# Altium PCB F407Z.PcbDoc (part 3 of 3)
Units mil, origin at the board's own origin, x right, y up, seen from the top; angles counter-clockwise.
Board outline 4724.41 x 3937.01 mil, 2 copper layers (Top Layer, Bottom Layer), stack 61.855 mil thick; 103 components, 137 nets, 547 pads, 2347 vias.
Unrouted connection lines stored in the file: 2.
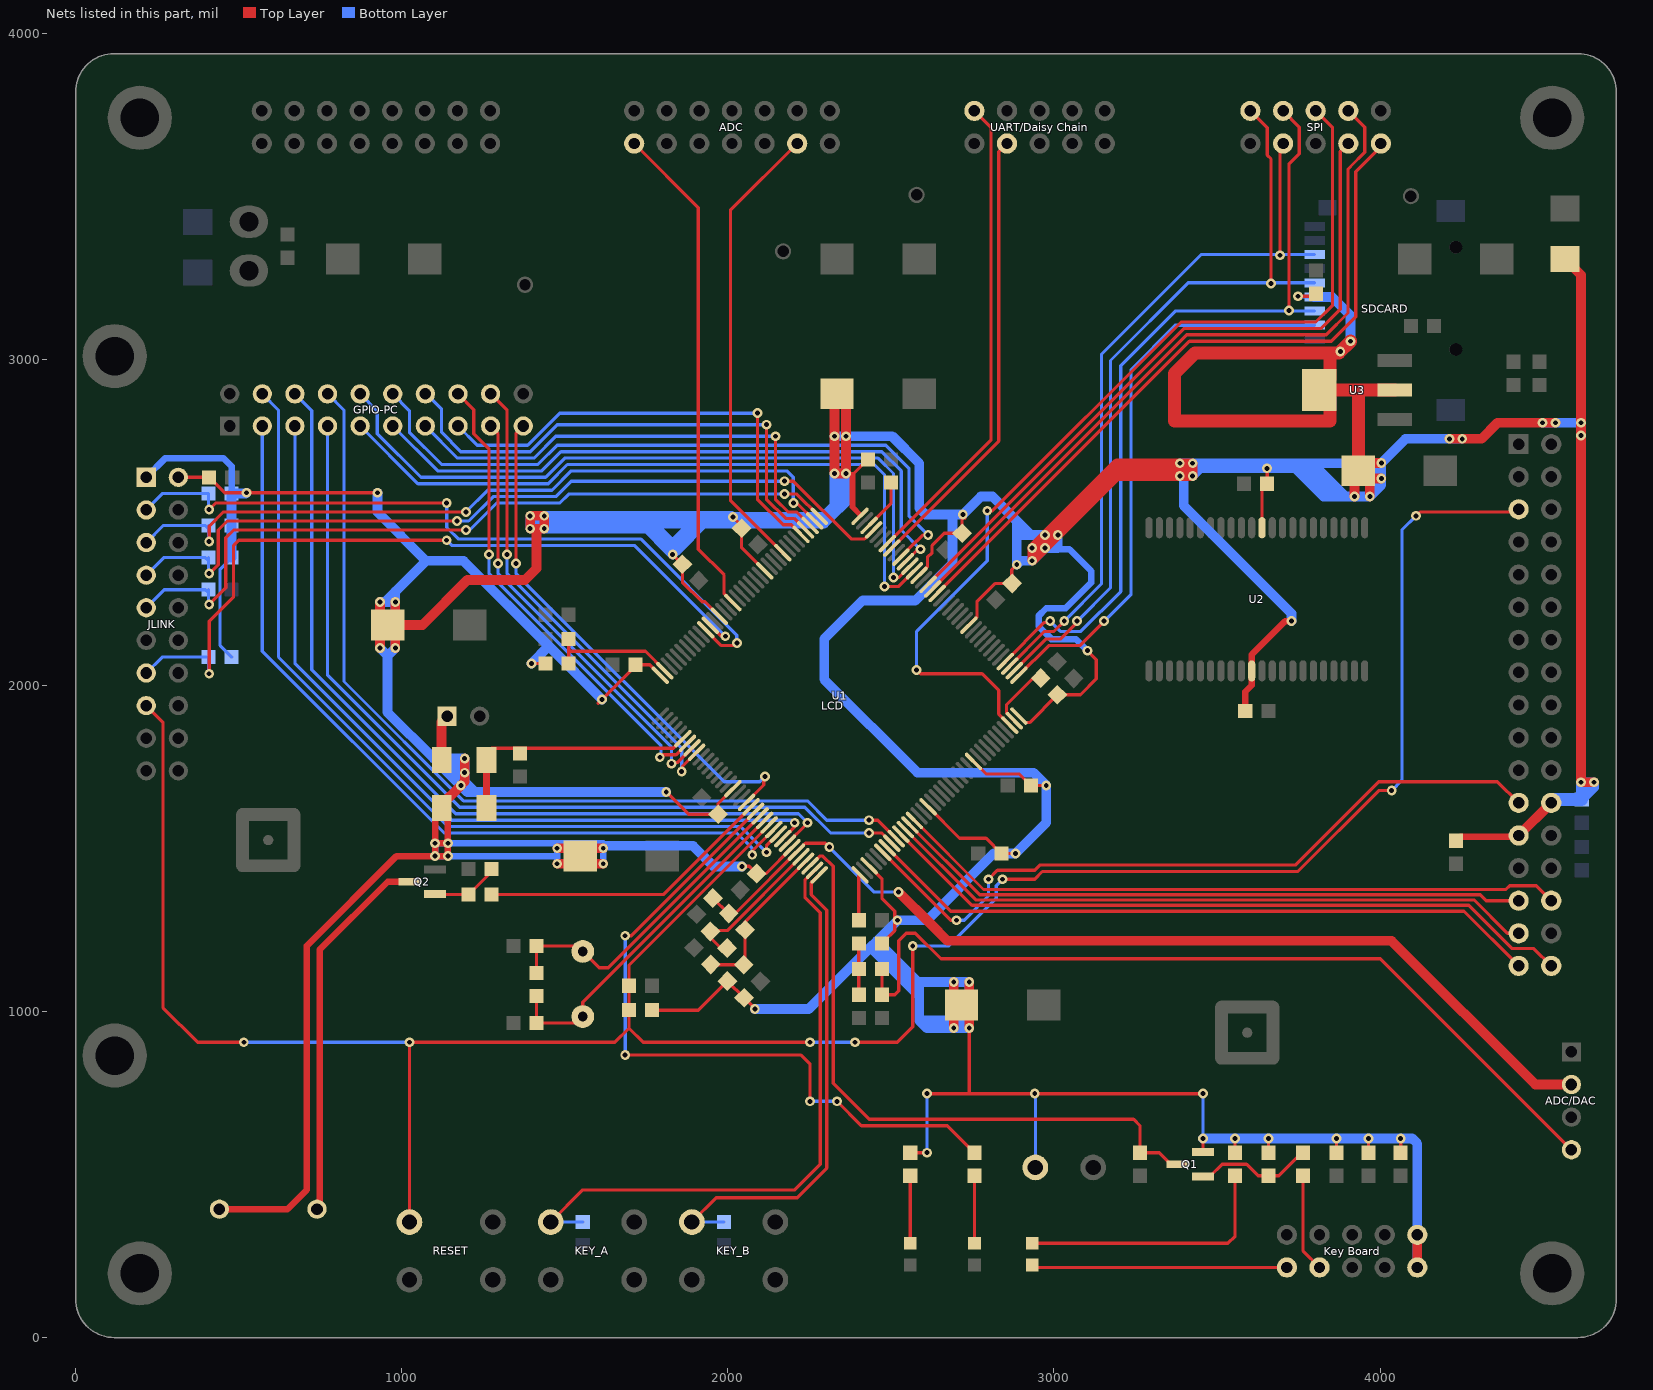
[diagram p3: the nets of this part, all layers, seen from the top]

## Via types
v1: diameter 30, hole 15, Top Layer to Bottom Layer, tented both sides, 2344 vias
v2: diameter 30, hole 15, Top Layer to Bottom Layer, 3 vias

## Nets (pads, with @x,y where several pads share a name; then routed paths per layer and width w, separated by ;. In a path a pad name is that pad's centre, name@x,y a point inside that pad or via, vN(x,y) a via of type N, cw(c..) or ccw(c..) an arc to the next point about the centre after c; other vN are vias at no path point) (continued)
JTCK: JLINK.9 R13.2 U1.109 | length 2393
  Top Layer w10: v1(409.45,2248.03) 460.63,2299.21 460.63,2452.76 484.25,2476.38 v1(1196.85,2476.38) ; v1(2173.23,2586.61) 2211.59,2586.61 U1.109@2279.88,2518.32
  Bottom Layer w10: JLINK.9@216.54,2237.8 272.05,2293.31 397.64,2293.31 R13.2@407.48,2283.46 ; R13.2@407.48,2293.31 R13.2@407.48,2283.46 ; v1(409.45,2248.03) 407.48,2250 R13.2@407.48,2283.46 ; v1(1196.85,2476.38) 1208.66,2476.38 1291.34,2559.06 1484.25,2559.06 1511.81,2586.61 v1(2173.23,2586.61)
JTDI: JLINK.5 R11.2 U1.110 | length 2350.2
  Top Layer w10: v1(409.45,2440.94) 409.45,2488.19 452.76,2531.5 v1(1196.85,2531.5) ; v1(2200.79,2559.06) 2211.31,2559.06 U1.110@2265.96,2504.4
  Bottom Layer w10: JLINK.5@216.54,2437.8 268.9,2490.16 397.64,2490.16 R11.2@407.48,2480.32 ; R11.2@407.48,2490.16 R11.2@407.48,2480.32 ; v1(409.45,2440.94) 407.48,2442.91 R11.2@407.48,2480.32 ; v1(1196.85,2531.5) 1263.78,2598.43 1460.63,2598.43 1519.69,2657.48 2181.1,2657.48 2200.79,2637.8 v1(2200.79,2559.06)
JTDO: JLINK.13 R14.2 U1.133 | length 2384.4
  Top Layer w10: v1(409.45,2035.43) 409.45,2196.85 484.25,2271.65 484.25,2429.13 500,2444.88 v1(1137.8,2444.88) ; U1.133@1945.82,2184.26 1979.48,2150.59 v1(1992.13,2150.59)
  Bottom Layer w10: JLINK.13@216.54,2037.8 265.35,2086.61 R14.2@407.48,2086.61 407.48,2037.4 v1(409.45,2035.43) ; v1(1137.8,2444.88) 1153.54,2429.13 1713.58,2429.13 v1(1992.13,2150.59)
JTMS: JLINK.7 R12.2 U1.105 | length 2569.4
  Top Layer w10: v1(409.45,2342.52) 437.01,2370.08 437.01,2476.38 464.57,2503.94 v1(1169.29,2503.94) ; v1(2173.23,2625.98) 2200.79,2625.98 2377.95,2448.82 2419.17,2448.82 U1.105@2446.92,2476.56
  Bottom Layer w10: JLINK.7@216.54,2337.8 270.47,2391.73 397.64,2391.73 R12.2@407.48,2381.89 ; R12.2@407.48,2391.73 R12.2@407.48,2381.89 ; v1(409.45,2342.52) 407.48,2344.49 R12.2@407.48,2381.89 ; v1(1169.29,2503.94) 1204.72,2503.94 1206.28,2505.5 1207.62,2505.5 1280.86,2578.74 1472.44,2578.74 1519.69,2625.98 v1(2173.23,2625.98)
JTRST: JLINK.3 R10.2 U1.134 | length 2242.6
  Top Layer w10: v1(409.45,2539.37) 429.13,2559.06 v1(1137.8,2559.06) ; U1.134@1931.9,2170.34 1980.18,2122.05 2019.68,2122.05 v1(2027.56,2129.92)
  Bottom Layer w10: JLINK.3@216.54,2537.8 267.32,2588.58 R10.2@407.48,2588.58 407.48,2541.34 v1(409.45,2539.37) ; v1(1137.8,2559.06) 1137.8,2484.25 1141.73,2480.31 1173.23,2448.82 1732.28,2448.82 2027.56,2153.54 v1(2027.56,2129.92)
KB_INT: "Key Board.8" R19.2 | length 303.6
  Top Layer w10: R19.2@3767.72,496.06 3763.78,492.13 3763.78,265.35 3814.17,214.96
LCD_BL: LCD.23 U1.42 | length 2259.6
  Top Layer w10: U1.42@2474.75,1488.28 2675.64,1287.4 2683.51,1279.53 v1(2700.79,1279.53) ; v1(2799.21,1405.51) 2826.52,1432.82 2940.69,1432.82 2956.69,1448.82 3740.16,1448.82 3996.06,1704.72 4359.57,1704.72 LCD.23@4424.69,1639.61
  Bottom Layer w10: v1(2700.79,1279.53) 2724.41,1279.53 2732.28,1287.4 2799.21,1354.33 v1@2799.21,1395.67
NetBT1_1: BT1.1 D1.1 | length 140.9
  Top Layer w30: D1.1@1122.05,1771.65 1122.05,1888.58 BT1.1@1138.98,1905.51
NetC5_1: C5.1 D1.2 D2.2 U1.6 | length 788.4
  Top Layer w10: D1.2@1259.84,1771.65 1259.84,1791.34 1275.59,1807.09 1833.12,1807.09 U1.6@1862.3,1836.27
  Top Layer w20: D2.2@1259.84,1624.02 D1.2@1259.84,1771.65
NetC8_2: C8.2 R21.2 R22.1 | length 157.5
  Top Layer w10: C8.2@2401.57,1051.18 R22.1@2401.57,1129.92 R21.2@2401.57,1208.66
NetIO_1: IO.1 R26.1 | length 206.7
  Top Layer w10: IO.1@2755.91,289.37 R26.1@2755.91,496.06
NetKB_LED_1: KB_LED.1 R17.1 | length 816.1
  Top Layer w10: KB_LED.1@2933.07,289.37 3533.46,289.37 3555.12,311.02 R17.1@3555.12,496.06
NetKB_LED_2: "Key Board.10" KB_LED.2 | length 784.2
  Top Layer w10: KB_LED.2@2933.07,222.44 2940.55,214.96 3714.17,214.96
NetLS1_2: LS1.2 Q2.3 | length 1160.6
  Top Layer w20: LS1.2@740.16,393.7 748.03,401.57 748.03,866.14 748.03,1188.98 956.69,1397.64 Q2.3@1023.62,1397.64
NetON_1: ON.1 R25.1 | length 206.7
  Top Layer w10: ON.1@2559.06,289.37 R25.1@2559.05,496.06
NetQ1_1: Q1.1 R18.1 R19.1 | length 366.6
  Top Layer w10: Q1.1@3456.69,494.09 3478.35,494.09 3515.75,531.5 3590.55,531.5 3625.98,496.06 R18.1@3657.48,496.06 3688.98,496.06 3759.84,566.93 R19.1@3763.78,566.93
NetQ2_1: Q2.1 R23.2 R24.2 | length 211.3
  Top Layer w10: Q2.1@1102.36,1360.24 1104.33,1358.27 R23.2@1204.72,1358.27 1275.59,1429.13 R24.2@1275.59,1437.01
NetR1_1: R1.1 R3.2 U1.32 | length 496.7
  Top Layer w10: R3.2@1946.31,1245.53 R3.2@1952.76,1245.53 ; R1.1@1995.37,1196.47 R1.1@1997.5,1194.35 1978.88,1194.35 1925.2,1248.03 1997.87,1248.03 U1.32@2224.2,1474.36
OSC_IN: C3.1 R2.2 U1.23 Y1.2 | length 995.4
  Top Layer w10: R2.2@1413.39,1118.11 C3.1@1413.39,1185.04 ; C3.1@1413.39,1200.79 C3.1@1413.39,1185.04 ; U1.23@2098.93,1599.64 1633.15,1133.86 1605.51,1133.86 Y1.2@1555.12,1184.25 1538.58,1200.79 1429.13,1200.79 C3.1@1413.39,1185.04
OSC_OUT: C4.1 R2.1 U1.24 Y1.1 | length 1045.4
  Top Layer w10: C4.1@1413.39,964.57 R2.1@1413.39,1047.24 ; C4.1@1433.07,964.57 1535.43,964.57 Y1.1@1555.12,984.25 1555.12,1027.99 U1.24@2112.85,1585.72
PA0: Q1.3 R20.2 U1.34 | length 1967.8
  Top Layer w10: U1.34@2252.04,1446.53 2281.9,1476.38 2291.34,1476.38 2322.83,1444.88 2322.83,779.53 2433.07,669.29 3244.09,669.29 3263.78,649.61 R20.2@3263.78,566.93 3322.83,566.93 3358.27,531.5 Q1.3@3377.95,531.5
PA1: C10.1 KEY_A.1 U1.35 | length 1931.6
  Top Layer w10: KEY_A.1@1456.69,354.33 1555.12,452.76 2204.72,452.76 2283.46,531.5 2283.46,1303.15 2236.22,1350.39 2236.22,1402.86 U1.35@2265.96,1432.61
  Bottom Layer w10: KEY_A.1@1456.69,354.33 C10.1@1555.12,354.33
PA2: C11.1 KEY_B.1 U1.36 | length 1508.8
  Top Layer w10: KEY_B.1@1889.76,354.33 1964.57,429.13 2212.6,429.13 2303.15,519.68 2303.15,1311.02 2255.91,1358.27 2255.91,1394.71 U1.36@2279.88,1418.69
  Bottom Layer w10: KEY_B.1@1889.76,354.33 C11.1@1988.19,354.33
PA3: R21.1 U1.37 | length 140.6
  Top Layer w10: R21.1@2401.57,1279.53 2401.57,1415.1 U1.37@2405.16,1418.69
PA7: LCD.33 U1.43 | length 2086.2
  Top Layer w10: U1.43@2488.67,1502.2 2683.79,1307.09 4257.2,1307.09 LCD.33@4424.69,1139.61
PA9: "UART/Daisy Chain.3" U1.101 | length 1386.9
  Top Layer w10: U1.101@2502.59,2420.89 2830.71,2749 2830.71,3636.22 2855.91,3661.42
PA10: "UART/Daisy Chain.2" U1.102 | length 1479.7
  Top Layer w10: U1.102@2488.67,2434.8 2807.09,2753.22 2807.09,3710.24 2755.91,3761.42
PB0: LCD.34 U1.46 | length 2161.7
  Top Layer w10: U1.46@2530.43,1543.96 2748.38,1326.02 4272.41,1326.02 4405.51,1192.91 4471.38,1192.91 LCD.34@4524.68,1139.61
PB1: LCD.31 U1.47 | length 2012.2
  Top Layer w10: U1.47@2544.35,1557.88 2760.22,1342.02 4287.91,1342.02 4390.32,1239.61 LCD.31@4424.69,1239.61
PB2: LCD.29 U1.48 | length 1962.6
  Top Layer w10: U1.48@2558.27,1571.8 2772.06,1358.02 4307.34,1358.02 4325.75,1339.61 LCD.29@4424.69,1339.61
PB11: SPI.6 U1.70 | length 2913.7
  Top Layer w10: v1(2578.74,2047.24) 2590.55,2035.43 2779.53,2035.43 2830.71,1984.25 2830.71,1911.82 U1.70@2864.5,1878.03 ; v1(2795.28,2535.43) 2811.02,2535.43 3389.76,3114.17 3803.15,3114.17 3854.33,3165.35 3854.33,3709.45 SPI.6@3802.36,3761.42
  Bottom Layer w10: v1(2578.74,2047.24) 2578.74,2165.35 2795.28,2381.89 v1(2795.28,2535.43)
PB12: SDCARD.2 U1.73 | length 1754.7
  Top Layer w10: U1.73@2892.34,2031.14 2983.24,2122.05 3078.74,2122.05 v1(3153.54,2196.85)
  Bottom Layer w10: v1(3153.54,2196.85) 3236.22,2279.53 3236.22,2968.5 3372.05,3104.33 SDCARD.2@3798.9,3104.33
PB13: SDCARD.5 SPI.2 U1.74 | length 2384.4
  Top Layer w10: U1.74@2878.42,2045.06 2975.09,2141.73 3019.69,2141.73 3074.8,2196.84 v1(3070.86,2196.85) ; SPI.2@3602.36,3761.42 3653.54,3710.24 3653.54,3625.98 3665.35,3614.17 v1(3665.35,3232.28)
  Bottom Layer w10: v1(3070.86,2196.85) 3173.23,2299.21 ; 3173.23,2299.23 3173.23,2996.06 3411.42,3234.25 SDCARD.5@3798.9,3234.25
PB14: SDCARD.7 SPI.3 U1.75 | length 2216.3
  Top Layer w10: U1.75@2864.5,2058.98 2970.87,2165.35 3000,2165.35 v1(3031.5,2196.85) ; v1(3692.91,3318.9) 3692.91,3330.71 3692.91,3651.97 SPI.3@3702.36,3661.42
  Bottom Layer w10: v1(3031.5,2196.85) 3145.67,2311.02 3145.67,3015.75 3450.79,3320.87 SDCARD.7@3798.9,3320.87
PB15: SDCARD.3 SPI.4 U1.76 | length 2476.5
  Top Layer w10: U1.76@2850.58,2072.9 2970.59,2192.91 2980.32,2192.91 2988.18,2200.78 v1(2988.18,2196.85) ; SPI.4@3702.36,3761.42 3751.97,3711.81 3751.97,3629.92 3720.47,3598.43 v1(3720.47,3149.61)
  Bottom Layer w10: v1(2988.18,2196.85) 3019.67,2165.35 3082.68,2165.35 3204.72,2287.4 3204.72,2980.31 3372.05,3147.64 SDCARD.3@3798.9,3147.64
PC0: GPIO-PC.3 U1.26 | length 2567.9
  Top Layer w10: v1(2074.8,1480.32) 2074.8,1492 U1.26@2140.69,1557.88
  Bottom Layer w10: GPIO-PC.3@572.44,2795.28 572.44,2104.72 1129.92,1547.24 2027.56,1547.24 2074.8,1500 v1(2074.8,1480.32)
PC1: GPIO-PC.4 U1.27 | length 2646.4
  Top Layer w10: v1@2118.11,1484.25 v1(2118.11,1488.19) 2118.11,1507.46 U1.27@2154.61,1543.96
  Bottom Layer w10: GPIO-PC.4@572.44,2893.7 622.05,2844.09 622.05,2086.61 1141.73,1566.93 2039.37,1566.93 v1(2118.11,1488.19)
PC2: GPIO-PC.5 U1.28 | length 2534.5
  Top Layer w10: U1.28@2168.53,1530.04 2212.6,1574.11 2207.97,1578.74 v1(2204.72,1578.74)
  Bottom Layer w10: GPIO-PC.5@672.44,2795.28 672.44,2067.72 1153.54,1586.61 2196.85,1586.61 v1(2204.72,1578.74)
PC3: GPIO-PC.6 U1.29 | length 2669.9
  Top Layer w10: U1.29@2182.45,1516.12 2244.09,1577.77 v1(2244.09,1578.74)
  Bottom Layer w10: GPIO-PC.6@672.44,2893.7 724.41,2841.73 724.41,2047.24 1165.35,1606.3 2216.54,1606.3 v1(2244.09,1578.74)
PC4: GPIO-PC.7 U1.44 | length 2707.9
  Top Layer w10: v1(2433.07,1547.24) 2471.47,1547.24 U1.44@2502.59,1516.12
  Bottom Layer w10: GPIO-PC.7@772.44,2795.28 772.44,2030.71 1177.17,1625.98 2236.22,1625.98 2314.96,1547.24 v1(2433.07,1547.24)
PC5: GPIO-PC.8 U1.45 | length 2796
  Top Layer w10: v1(2433.07,1586.61) 2459.94,1586.61 U1.45@2516.51,1530.04
  Bottom Layer w10: GPIO-PC.8@772.44,2893.7 822.83,2843.31 822.83,2011.81 1188.98,1645.67 2244.09,1645.67 2303.15,1586.61 v1(2433.07,1586.61)
PC6: GPIO-PC.9 U1.96 | length 2173.1
  Top Layer w10: v1(2480.32,2303.15) 2524.05,2303.15 U1.96@2572.19,2351.29
  Bottom Layer w10: GPIO-PC.9@872.44,2795.28 1049.61,2618.11 1448.82,2618.11 1507.87,2677.17 2448.82,2677.17 2480.32,2645.67 v1(2480.32,2303.15)
PC7: GPIO-PC.10 U1.97 | length 2224.7
  Top Layer w10: v1(2507.87,2330.7) 2505.09,2330.7 2503.94,2331.86 2507.87,2335.8 v1(2507.87,2330.7) 2523.77,2330.71 U1.97@2558.27,2365.21
  Bottom Layer w10: GPIO-PC.10@872.44,2893.7 925.2,2840.94 925.2,2771.65 1059.06,2637.8 1440.94,2637.8 1500,2696.85 2460.63,2696.85 2507.87,2649.61 v1(2507.87,2330.7)
PC8: GPIO-PC.11 U1.98 | length 2001.9
  Top Layer w10: U1.98@2544.35,2379.13 2578.61,2413.39 2590.55,2413.39 v1(2590.55,2417.32) v1@2582.68,2417.32
  Bottom Layer w10: GPIO-PC.11@972.44,2795.28 1110.24,2657.48 1429.13,2657.48 1488.19,2716.54 2472.44,2716.54 2531.5,2657.48 2531.5,2476.38 v1(2590.55,2417.32)
PC9: GPIO-PC.12 U1.99 | length 2106.9
  Top Layer w10: U1.99@2530.43,2393.05 2530.43,2393.97 2579.78,2443.32 2580.71,2443.32 2598.02,2460.63 v1(2614.17,2460.63)
  Bottom Layer w10: GPIO-PC.12@972.44,2893.7 1023.62,2842.52 1023.62,2775.59 1122.05,2677.17 1417.32,2677.17 1476.38,2736.22 2484.25,2736.22 2555.12,2665.35 2555.12,2519.68 v1(2614.17,2460.63)
PC10: GPIO-PC.13 U1.111 | length 1474.3
  Top Layer w10: v1(2145.67,2763.78) 2145.67,2570.87 2185.04,2531.5 2211.03,2531.5 U1.111@2252.04,2490.48
  Bottom Layer w10: GPIO-PC.13@1072.44,2795.28 1170.87,2696.85 1405.51,2696.85 1472.44,2763.78 v1(2145.67,2763.78)
PC11: GPIO-PC.14 U1.112 | length 1582.2
  Top Layer w10: v1(2118.11,2799.21) 2118.11,2570.87 2177.17,2511.81 2202.88,2511.81 U1.112@2238.12,2476.56
  Bottom Layer w10: GPIO-PC.14@1072.44,2893.7 1074.8,2893.7 1122.05,2846.46 1122.05,2775.59 1181.1,2716.54 1393.7,2716.54 1476.38,2799.21 v1(2118.11,2799.21)
PC12: GPIO-PC.15 U1.113 | length 1425.6
  Top Layer w10: v1(2090.55,2834.65) 2090.55,2570.87 2169.29,2492.13 2194.72,2492.13 U1.113@2224.2,2462.64
  Bottom Layer w10: GPIO-PC.15@1172.44,2795.28 1231.5,2736.22 1385.83,2736.22 1484.25,2834.65 v1(2090.55,2834.65)
PC13: GPIO-PC.16 U1.7 | length 1478.7
  Top Layer w10: GPIO-PC.16@1172.44,2893.7 1220.47,2845.67 1220.47,2771.65 1267.72,2724.41 v1(1267.72,2401.57) ; v1(1791.34,1779.53) 1799.21,1787.4 1841.27,1787.4 U1.7@1876.22,1822.35
  Bottom Layer w10: v1(1267.72,2401.57) 1267.72,2342.52 1795.28,1814.96 1795.28,1779.53 v1(1791.34,1779.53)
PC14: GPIO-PC.17 U1.8 | length 1360.9
  Top Layer w10: GPIO-PC.17@1272.44,2795.28 1271.65,2794.49 1295.28,2770.87 v1(1295.28,2374.02) ; v1@1819.87,1751.97 1831.43,1763.53 1846.2,1763.53 1890.14,1807.46 U1.8@1890.14,1808.43 ; v1@1826.77,1758.87 v1(1826.77,1759.84)
  Bottom Layer w10: v1(1295.28,2374.02) 1295.28,2342.52 1826.77,1811.03 v1(1826.77,1759.84)
PC15: GPIO-PC.18 U1.9 | length 1477.4
  Top Layer w10: GPIO-PC.18@1272.44,2893.7 1322.83,2843.31 v1(1322.83,2401.57) ; v1(1858.27,1736.22) 1858.27,1738.82 1860.65,1741.2 1860.65,1751.1 U1.9@1904.06,1794.51
  Bottom Layer w10: v1(1322.83,2401.57) 1322.83,2342.52 1858.27,1807.09 v1(1858.27,1736.22)
PD3: ADC.11 U1.117 | length 1405.8
  Top Layer w10: U1.117@2168.53,2406.97 2007.87,2567.62 2007.87,3456.69 ADC.11@2212.6,3661.42
PDR_ON: R4.2 R5.2 U1.143 | length 394.2
  Top Layer w10: R4.2@1511.81,2066.93 1511.81,2104.33 ; R5.2@1511.81,2141.73 1511.81,2104.33 ; U1.143@1806.62,2045.06 1747.35,2104.33 1511.81,2104.33
PF8: GPIO-PC.19 U1.20 | length 1601.4
  Top Layer w10: v1(1350.39,2374.02) 1350.39,2773.23 1370.08,2792.92 GPIO-PC.19@1372.44,2795.28 ; U1.20@2057.17,1641.4 2110.24,1694.46 2110.24,1720.47 v1(2114.17,1720.47)
  Bottom Layer w10: v1(1350.39,2374.02) 1350.39,2342.52 1370.08,2322.83 1988.19,1704.72 2098.43,1704.72 v1(2114.17,1720.47)
PF9: R23.1 U1.21 | length 907
  Top Layer w10: R23.1@1275.59,1358.27 1801.88,1358.27 U1.21@2071.09,1627.48
PF10: R26.2 U1.22 | length 2185.7
  Top Layer w10: v1(1685.04,866.14) 2224.41,866.14 2251.97,838.58 v1(2251.97,724.41) ; v1(1685.04,1232.28) 1703.74,1232.28 U1.22@2085.01,1613.56 ; v1(2334.65,724.41) 2409.45,649.61 2673.23,649.61 R26.2@2755.91,566.93
  Bottom Layer w10: v1(1685.04,866.14) v1(1685.04,1232.28) ; v1(2251.97,724.41) v1(2334.65,724.41)
PF11: LCD.30 U1.49 | length 2064.2
  Top Layer w10: U1.49@2572.19,1585.72 2783.89,1374.02 4385.83,1374.02 4397.64,1385.83 4478.46,1385.83 LCD.30@4524.69,1339.61
PG6: SPI.9 U1.91 | length 2198.2
  Top Layer w10: U1.91@2641.79,2281.69 3415.21,3055.12 3850.39,3055.12 3925.2,3129.92 3925.2,3574.8 4002.36,3651.97 SPI.9@4002.36,3661.42
PG7: SPI.8 U1.92 | length 2285.9
  Top Layer w10: U1.92@2627.87,2295.61 3407.06,3074.8 3834.65,3074.8 3901.57,3141.73 3901.57,3582.68 3909.2,3590.3 3909.2,3590.88 3952.76,3634.44 3952.76,3711.02 SPI.8@3902.36,3761.42
PG8: SPI.7 U1.93 | length 2131.6
  Top Layer w10: U1.93@2613.95,2309.53 3398.91,3094.49 3818.9,3094.49 3877.95,3153.54 3877.95,3637.01 SPI.7@3902.36,3661.42
PG13: ADC.1 U1.128 | length 1533
  Top Layer w10: ADC.1@1712.6,3661.42 1909.45,3464.57 1909.45,2417.32 1988.19,2338.58 1988.19,2281.08 U1.128@2015.41,2253.85
PWM_OUT: ADC/DAC.4 C9.2 R22.2 | length 2631.5
  Top Layer w10: R22.2@2472.44,1129.92 C9.2@2472.44,1051.18 2511.81,1051.18 2523.62,1062.99 2523.62,1216.54 2547.24,1240.16 2574.8,1240.16 2653.54,1161.42 4000,1161.42 4576.77,584.65 ADC/DAC.4@4576.77,575.98
RESET: C6.1 JLINK.15 LCD.5 R9.1 RESET.1 U1.25 | length 7839.1
  Top Layer w10: JLINK.15@216.54,1937.8 267.72,1886.62 267.72,1011.81 374.02,905.51 v1(515.75,905.51) ; RESET.1@1023.62,354.33 v1(1023.62,905.51) 1653.54,905.51 1696.85,948.82 ; U1.25@2126.77,1571.8 1696.85,1141.88 C6.1@1696.85,1078.74 R9.1@1696.85,1003.94 1696.85,948.82 ; v1(2251.97,905.51) 1740.16,905.51 1696.85,948.82 ; v1(2389.76,905.51) 2519.68,905.51 2566.93,952.76 v1(2566.93,1200.79) ; v1(2842.52,1405.51) 2940.94,1405.51 2964.57,1429.13 3748.03,1429.13 3996.06,1677.17 v1(4035.43,1677.17) ; v1(4110.24,2519.68) 4122.05,2531.5 4416.57,2531.5 LCD.5@4424.69,2539.61
  Bottom Layer w10: v1(515.75,905.51) v1(1023.62,905.51) ; v1(2251.97,905.51) v1(2389.76,905.51) ; v1(2566.93,1200.79) 2677.17,1200.79 2822.83,1346.46 2822.83,1385.83 v1(2842.52,1405.51) ; v1@4027.56,1677.17 v1(4035.43,1677.17) 4066.93,1708.66 4066.93,2476.38 v1(4110.24,2519.68)
VCAP1: C2.2 U1.71 | length 197.5
  Top Layer w10: U1.71@2878.42,1891.95 2854.33,1916.03 2854.33,1940.94 2935.57,2022.19 C2.2@2959.2,2022.19
VCAP2: C1.2 U1.106 | length 163.3
  Top Layer w10: U1.106@2433,2490.48 2500,2557.49 C1.2@2500,2625.98
VCC: 3.3V.1 "Key Board.1" "Key Board.2" C101.2 C102.2 C103.2 C104.2 C105.2 C106.2 C107.2 C108.2 C109.2 C110.2 C111.2 C112.2 C113.2 C114.2 C115.2 C116.2 C117.2 C118.2 C119.2 C120.2 C129.1 C130.1 C131.1 C132.1 C133.1 D2.1 D4.2 JLINK.1 JLINK.2 LCD.24 LCD.25 LS1.1 Q1.2 R4.1 R7.2 R9.2 R10.1 R11.1 R12.1 R14.1 R15.2 R16.2 R17.2 R18.2 R25.2 SDCARD.4 U1.17 U1.30 U1.39 U1.52 U1.62 U1.72 U1.84 U1.95 U1.108 U1.121 U1.131 U1.144 U2.11 U2.33 U3.2 | length 36798.3
  Top Layer w10: JLINK.2@314.96,2637.8 C120.2@409.45,2637.8 456.69,2590.55 v1(523.62,2590.55) 531.5,2598.43 539.37,2590.55 v1(925.2,2590.55) ; D2.1@1122.05,1624.02 D2.1@1122.05,1633.86 ; v1(1397.64,2066.93) R4.1@1440.95,2066.93 ; 1602.36,1944.88 v1(1614.17,1956.69) 1716.54,2059.06 C108.2@1716.54,2062.99 1760.85,2062.99 U1.144@1792.7,2031.14 ; R9.2@1767.72,1003.94 1909.45,1003.94 R7.2@1998.57,1093.06 C116.2@2049.75,1041.87 v1@2083.75,1007.87 ; v1(1811.02,1673.23) 1879.39,1604.87 C109.2@1969.94,1604.87 1969.94,1637.68 U1.17@2015.41,1683.16 ; v1@1826.77,2405.51 C107.2@1860.77,2371.51 1860.77,2316.39 1921.26,2255.91 1929.84,2255.91 U1.131@1973.66,2212.09 ; v1(2015.75,2515.75) 2041.87,2489.62 C106.2@2041.87,2481.75 2041.87,2422.26 U1.121@2112.85,2351.29 ; v1(2043.31,1444.88) 2065.86,1444.88 C110.2@2088.05,1422.69 2116.86,1422.69 U1.30@2196.37,1502.2 ; v1(2082.68,1007.87) v1@2083.75,1007.87 ; v1@2086.61,1005.01 v1@2083.75,1007.87 ; v1(2362.2,2649.61) 2370.08,2649.61 2377.95,2649.61 ; U1.108@2405.16,2518.32 2385.83,2537.65 ; U1.108@2409.45,2523.62 2385.83,2547.24 ; C111.2@2429.13,2692.91 2385.83,2649.61 ; U1.39@2433,1446.53 2472.44,1407.08 2472.44,1347.2 2511.81,1307.83 v1@2511.81,1275.59 ; C101.2@2464.57,1216.54 2480.31,1216.54 2511.81,1248.03 v1@2511.81,1275.59 ; v1(2519.68,1279.53) 2515.75,1279.53 v1@2511.81,1275.59 ; R25.2@2559.05,566.93 2618.11,566.93 v1(2610.24,566.93) ; U1.95@2586.11,2337.37 2611.8,2363.05 2611.8,2392.66 2625.98,2406.85 2625.98,2429.13 2662.85,2466 C112.2@2717.97,2466 2717.97,2521.12 v1@2720.47,2518.61 ; v1(2610.24,748.03) 2740.16,748.03 ; U1.52@2613.95,1627.48 2710.18,1531.24 2791.59,1531.24 C102.2@2838.58,1484.25 v1(2881.89,1484.25) ; v1(2720.47,2523.62) v1@2720.47,2518.61 ; v1@2727.28,2511.81 v1@2720.47,2518.61 ; U1.84@2739.22,2184.26 2763.78,2208.81 2763.78,2255.91 2820.33,2312.46 C105.2@2871.51,2312.46 2879.92,2320.87 2870.08,2311.02 2870.08,2354.33 v1(2885.83,2370.08) ; v1(2740.16,949.37) 2740.16,748.03 ; U1.62@2753.14,1766.67 2791.72,1728.09 2893.95,1728.09 C103.2@2929.13,1692.91 v1(2976.38,1692.91) ; U1.72@2913.39,1885.83 2925.2,1885.83 C104.2@3010.38,1971.01 3081.24,1971.01 3129.92,2019.69 3129.92,2078.74 v1(3102.36,2106.3) ; Q1.2@3456.69,568.9 v1(3456.69,610.24) ; v1(3456.69,748.03) v1(2940.94,748.03) 2740.16,748.03 ; R17.2@3555.12,566.93 v1(3555.12,610.24) ; U2.33@3637.8,2483.27 3637.8,2602.36 C114.2@3653.54,2618.11 v1(3653.54,2665.35) ; R18.2@3657.48,566.93 v1(3657.48,610.24) ; v1(3748.03,3192.91) 3799.21,3192.91 C118.2@3803.15,3196.85 ; R16.2@3866.14,566.93 v1(3866.14,610.24) ; R15.2@3964.57,566.93 v1(3964.57,610.24) ; C115.2@4062.99,566.93 v1(4062.99,610.24) ; 2377.95,2649.61 2385.83,2649.61 ; 2377.95,2649.61 2377.95,2545.53 2385.83,2537.65 ; 2385.83,2537.65 2385.83,2547.24 ; 2385.83,2547.24 2385.83,2649.61
  Top Layer w20: LS1.1@440.94,393.7 649.61,393.7 708.66,452.76 708.66,1200.79 984.25,1476.38 v1(1102.36,1476.38) ; C113.2@3586.61,1921.26 3586.61,1980.32 3606.3,2000 U2.11@3606.3,2044.29 3606.3,2094.49 3708.66,2196.85 v1(3728.35,2196.85) ; C117.2@4248.03,1535.43 4420.51,1535.43 LCD.25@4424.69,1539.61 ; v1(1102.36,1476.38) v1(1102.36,1515.75) ; v1(1102.36,1476.38) v1(1141.73,1476.38) v1(1141.73,1515.75) ; v1(1102.36,1515.75) 1102.36,1604.33 D2.1@1122.05,1624.02 1141.73,1604.33 v1(1141.73,1515.75) ; v1(1102.36,1515.75) v1(1141.73,1515.75)
  Top Layer w30: v1(932.91,2114.72) C129.1@932.91,2161.61 ; C129.1@932.91,2209.02 v1(932.91,2255.91) ; C129.1@956.61,2185.32 1063.27,2185.32 1200.79,2322.83 1377.95,2322.83 1413.39,2358.27 1413.39,2480.32 ; v1(980.32,2114.72) C129.1@980.32,2161.61 ; C129.1@980.32,2209.02 v1(980.32,2255.91) ; D2.1@1122.05,1633.86 v1(1181.1,1692.91) 1192.91,1704.72 v1(1192.91,1732.28) v1(1192.91,1775.59) ; v1(1476.57,1452.95) C130.1@1523.46,1452.95 ; v1(1476.57,1500.35) C130.1@1523.46,1500.35 ; C130.1@1570.87,1452.95 v1(1617.76,1452.95) ; C130.1@1570.87,1500.35 v1(1617.76,1500.35) ; v1(2692.76,949.37) C131.1@2692.76,996.26 ; C131.1@2692.76,1043.66 v1(2692.76,1090.55) ; v1(2740.16,949.37) C131.1@2740.16,996.26 ; C131.1@2740.16,1043.66 v1(2740.16,1090.55) ; v1(3921.26,2578.74) 3921.26,2646.02 C133.1@3932.99,2657.76 3968.5,2622.24 v1(3968.5,2578.74) ; C133.1@3956.77,2634.06 v1(4003.66,2634.06) ; C133.1@3956.77,2681.46 v1(4003.66,2681.46) ; 4114.17,214.96 4114.17,314.96 ; v1(4212.6,2755.91) v1(4251.97,2755.91) 4311.02,2755.91 4360.24,2805.12 v1(4498.03,2805.12) v1(4537.4,2805.12) ; LCD.25@4424.69,1539.61 LCD.24@4524.69,1639.61 ; D4.2@4566.93,3307.09 4616.14,3257.87 v1(4616.14,2805.12) v1(4616.14,2765.75) v1(4616.14,1702.76) v1(4655.51,1702.76) ; 1413.39,2480.32 v1(1393.7,2480.32) v1(1393.7,2519.68) v1(1437.01,2519.68) v1(1437.01,2480.32) 1413.39,2480.32 ; v1(2972.44,2421.26) v1(3011.81,2460.63) ; v1(2972.44,2421.26) v1(2933.07,2381.89) v1(2933.07,2421.26) v1(2972.44,2460.63) ; v1(2972.44,2421.26) v1(2972.44,2460.63) ; v1(2972.44,2460.63) 3011.81,2500 ; v1(3011.81,2460.63) 3011.81,2500 ; v1(3011.81,2460.63) 3192.91,2641.73 v1(3385.83,2641.73) v1(3425.2,2641.73) 3425.2,2665.35 ; 3011.81,2500 3181.1,2669.29 ; 3181.1,2669.29 3421.26,2669.29 3425.2,2665.35 ; 3181.1,2669.29 3192.91,2681.1 v1(3385.83,2681.1) v1(3425.2,2681.1) 3425.2,2665.35 ; v1(2326.77,2649.61) v1(2362.2,2649.61) v1(2362.2,2763.78) 2362.2,2866.34 C132.1@2334.57,2893.98 2326.77,2886.18 v1(2326.77,2763.78) v1(2326.77,2649.61)
  Top Layer w40: v1(3909.45,3055.12) 3874.02,3019.68 3846.46,3019.68 ; C133.1@3933.07,2657.76 3933.07,2905.51 ; U3.2@4045.28,2905.51 U3.2@3838.58,2905.51 ; U3.2@3838.58,2905.51 3846.46,2897.64 3846.46,2811.02 3370.08,2811.02 3370.08,2956.69 3433.07,3019.68 3846.46,3019.68 ; U3.2@3838.58,2905.51 U3.2@3812.99,2905.51 3846.46,2938.98 3846.46,3019.68
  Bottom Layer w10: R14.1@478.35,2086.61 442.91,2122.05 442.91,2356.3 R12.1@478.35,2391.73 ; v1(2610.24,566.93) v1(2610.24,748.03) ; v1(2940.94,748.03) 2942.91,746.06 3.3V.1@2942.91,521.65 ; v1(3456.69,610.24) v1(3456.69,748.03) ; v1(3748.03,3192.91) 3750,3190.95 SDCARD.4@3798.9,3190.95
  Bottom Layer w20: JLINK.1@216.54,2637.8 275.59,2696.85 452.76,2696.85 478.35,2671.26 R10.1@478.35,2588.58 ; 3015.75,2417.32 3047.24,2417.32 3114.17,2350.39 3114.17,2314.96 3035.43,2236.22 2976.38,2236.22 2952.76,2212.6 2952.76,2181.1 2992.13,2141.73 3066.93,2141.73 v1(3102.36,2106.3) ; 1476.38,1515.75 1476.57,1515.55 v1(1476.57,1500.35) 1476.57,1476.65 ; 1476.38,1515.75 v1(1141.73,1515.75) v1(1102.36,1515.75) v1(1102.36,1476.38) v1(1141.73,1476.38) 1476.3,1476.38 1476.57,1476.65 ; 1476.38,1515.75 1618.11,1515.75 1618.11,1507.87 1618.11,1453.31 v1(1617.76,1452.95) v1(1476.57,1452.95) 1476.57,1476.65
  Bottom Layer w30: R12.1@478.35,2391.73 R11.1@478.35,2490.16 R10.1@478.35,2588.58 521.65,2588.58 v1(523.62,2590.55) ; v1(925.2,2590.55) 925.2,2531.5 1074.8,2381.89 ; 952.76,2094.88 v1(932.91,2114.72) v1(932.91,2255.91) 948.82,2255.91 ; v1(1397.64,2066.93) 1450.79,2120.08 ; v1(1614.17,1956.69) 1450.79,2120.08 ; v1@1618.11,1507.87 1893.7,1507.87 1956.69,1444.88 v1(2043.31,1444.88) ; v1(1811.02,1673.23) 1224.41,1673.23 ; v1(2082.68,1007.87) 2248.03,1007.87 2437.01,1196.85 ; v1(2326.77,2649.61) 2326.77,2551.18 ; v1(2326.77,2763.78) v1(2362.2,2763.78) 2503.94,2763.78 2586.61,2681.1 2586.61,2543.31 2606.3,2523.62 2688.98,2523.62 ; 2933.07,2460.63 2929.13,2460.63 ; 3397.64,2625.98 3397.64,2551.18 3728.35,2220.47 v1(3728.35,2196.85) ; 3449.39,2665.92 v1(3425.2,2641.73) ; v1(3456.69,610.24) v1(3555.12,610.24) v1(3657.48,610.24) v1(3866.14,610.24) v1(3964.57,610.24) v1(4062.99,610.24) 4098.43,610.24 4114.17,594.49 4114.17,314.96 4114.17,214.96 ; 3767.72,2637.8 3763.78,2641.73 ; SDCARD.4@3798.9,3190.95 3852.36,3190.95 3909.45,3133.86 v1(3909.45,3055.12) v1(3877.95,3023.62) ; v1(4251.97,2755.91) v1(4212.6,2755.91) 4078.11,2755.91 v1(4003.66,2681.46) ; v1(4498.03,2805.12) v1(4537.4,2805.12) v1(4616.14,2805.12) v1(4616.14,2765.75) ; 948.82,2255.91 v1(980.32,2255.91) ; 948.82,2255.91 980.32,2287.4 ; v1(980.32,2255.91) 980.32,2287.4 ; v1(980.32,2255.91) v1(980.32,2114.72) 960.47,2094.88 956.69,2094.88 956.69,1917.32 1098.43,1775.59 ; 980.32,2287.4 1074.8,2381.89 ; 1074.8,2381.89 1188.98,2381.89 1450.79,2120.08 ; 1098.43,1775.59 1165.35,1775.59 ; 1098.43,1775.59 1129.92,1744.09 ; 1129.92,1744.09 1133.86,1744.09 1165.35,1775.59 ; 1129.92,1744.09 1165.35,1708.66 ; 1165.35,1708.66 v1(1181.1,1692.91) ; 1165.35,1708.66 1165.35,1775.59 ; 1165.35,1775.59 v1(1192.91,1775.59) v1(1192.91,1732.28) 1192.91,1704.72 ; v1(1181.1,1692.91) 1192.91,1704.72 ; v1(1181.1,1692.91) 1200.79,1673.23 1224.41,1673.23 ; 1192.91,1704.72 1224.41,1673.23 ; 1393.7,2496.06 1437.01,2496.06 ; 1393.7,2496.06 v1(1393.7,2480.32) v1(1437.01,2480.32) ; 1393.7,2496.06 v1(1393.7,2519.68) v1(1437.01,2519.68) ; v1(1437.01,2480.32) 1751.97,2480.32 1814.96,2417.32 ; v1(1437.01,2480.32) 1437.01,2496.06 ; 1437.01,2496.06 v1(1437.01,2519.68) ; 1437.01,2496.06 1771.65,2496.06 ; v1(1437.01,2519.68) 2011.81,2519.68 v1(2015.75,2515.75) ; 1771.65,2496.06 1771.65,2492.13 1830.71,2433.07 1846.46,2417.32 ; 1771.65,2496.06 1893.7,2496.06 ; 1814.96,2417.32 v1(1830.71,2401.57) 1846.46,2417.32 ; 1814.96,2417.32 1893.7,2496.06 ; 1846.46,2417.32 1925.2,2496.06 ; 1893.7,2496.06 1925.2,2496.06 ; 1925.2,2496.06 1996.06,2496.06 ; 1996.06,2496.06 v1(2015.75,2515.75) ; 1996.06,2496.06 2295.28,2496.06 2314.96,2515.75 ; v1(2015.75,2515.75) 2291.34,2515.75 ; 2291.34,2515.75 2314.96,2515.75 ; 2291.34,2515.75 2326.77,2551.18 ; 2314.96,2515.75 2362.2,2562.99 v1(2362.2,2649.61) 2334.65,2649.61 2334.65,2559.06 2326.77,2551.18 ; 2437.01,1196.85 2456.69,1216.54 ; 2437.01,1196.85 2586.61,1047.24 ; 2456.69,1216.54 v1(2519.68,1279.53) 2610.24,1279.53 2814.96,1484.25 v1(2881.89,1484.25) 2976.38,1578.74 v1(2976.38,1692.91) 2937.01,1732.28 2581.34,1732.28 2295.28,2018.35 2295.28,2141.73 2413.39,2259.84 2574.8,2259.84 2688.98,2374.02 2688.98,2523.62 ; 2456.69,1216.54 2582.68,1090.55 ; 2582.68,1090.55 2586.61,1086.61 2586.61,1047.24 ; 2582.68,1090.55 v1(2692.76,1090.55) v1(2740.16,1090.55) 2740.16,976.38 ; 2586.61,972.44 2736.22,972.44 2740.16,976.38 ; 2586.61,972.44 2609.69,949.37 v1(2692.76,949.37) v1(2740.16,949.37) 2740.16,976.38 ; 2586.61,972.44 2586.61,1047.24 ; 2688.98,2523.62 v1(2720.47,2523.62) 2775.59,2578.74 2811.02,2578.74 2885.83,2503.94 ; 2885.83,2460.63 2929.13,2460.63 ; 2885.83,2460.63 2885.83,2503.94 ; 2885.83,2460.63 v1(2885.83,2370.08) 2897.64,2381.89 v1(2933.07,2381.89) v1(2972.44,2421.26) ; 2885.83,2503.94 2929.13,2460.63 ; 2929.13,2460.63 v1(2972.44,2460.63) v1(3011.81,2460.63) ; v1(2972.44,2421.26) v1(3011.81,2460.63) ; v1(2972.44,2421.26) 3011.81,2421.26 v1(3011.81,2460.63) ; v1(3425.2,2641.73) 3425.2,2661.42 ; v1(3425.2,2641.73) v1(3385.83,2641.73) v1(3385.83,2681.1) v1(3425.2,2681.1) ; 3425.2,2661.42 3429.7,2665.92 3550.34,2665.92 3550.91,2665.35 ; 3425.2,2661.42 v1(3425.2,2681.1) ; v1(3425.2,2681.1) 3637.8,2681.1 ; 3550.91,2665.35 3740.16,2665.35 ; 3550.91,2665.35 v1(3653.54,2665.35) ; 3637.8,2681.1 v1(3653.54,2665.35) ; 3637.8,2681.1 3759.84,2681.1 ; v1(3653.54,2665.35) 3740.16,2665.35 ; 3740.16,2665.35 3763.78,2641.73 ; 3759.84,2681.1 3759.84,2677.17 3858.27,2578.74 ; 3759.84,2681.1 3795.28,2681.1 ; 3763.78,2641.73 3826.77,2578.74 3858.27,2578.74 ; 3795.28,2681.1 3795.28,2677.17 3893.7,2578.74 ; 3795.28,2681.1 3984.25,2681.1 ; 3858.27,2578.74 3893.7,2578.74 ; 3893.7,2578.74 v1(3921.26,2578.74) v1(3968.5,2578.74) 3984.25,2594.49 ; 3984.25,2594.49 4003.66,2613.9 v1(4003.66,2634.06) v1(4003.66,2681.46) ; 3984.25,2594.49 3984.25,2681.1 ; 3984.25,2681.1 4003.31,2681.1 v1(4003.66,2681.46) ; C119.2@4635.83,1667.32 C119.2@4618.11,1649.61 4616.14,1651.57 v1(4616.14,1702.76) 4635.83,1702.76 ; C119.2@4635.83,1667.32 4635.83,1702.76 ; C119.2@4635.83,1667.32 4655.51,1687.01 v1(4655.51,1702.76) 4635.83,1702.76
  Bottom Layer w40: LCD.24@4524.69,1639.61 4534.69,1649.61 C119.2@4618.11,1649.61
VCCA: C7.2 R1.2 R7.1 U1.33 | length 475.1
  Top Layer w10: R1.2@1947.39,1144.24 1948.46,1143.16 R7.1@2048.68,1143.16 2052.61,1147.1 C7.2@2052.61,1250.54 ; C7.2@2051.18,1273.5 U1.33@2238.12,1460.45
VSSA: ADC/DAC.2 C7.1 R8.1 U1.31 | length 3017.9
  Top Layer w10: R8.1@1954.19,1347.89 2001.43,1300.65 C7.1@2002.5,1300.65 ; C7.1@2022.42,1300.42 2237.75,1515.75 2299.21,1515.75 v1(2311.02,1503.94)
  Top Layer w30: v1(2523.62,1366.14) 2622.05,1267.72 2673.23,1216.54 4035.43,1216.54 4475.98,775.98 ADC/DAC.2@4576.77,775.98
  Bottom Layer w10: v1(2311.02,1503.94) 2448.82,1366.14 v1(2523.62,1366.14)
pads on no net: EUT1.1 EUT2.1 JLINK.11 JLINK.17 JLINK.19 KEY_A.0 KEY_A.3 KEY_B.0 KEY_B.3 LCD.0 LCD.32 RESET.0 RESET.3 SDCARD.0 SDCARD.1 SDCARD.8

## Polygon pours and split planes (outlines as drawn)
GND on Bottom Layer "Bottom Layer-No Net" (solid, remove dead copper, pour order 4): 0,0 4724.41,0 4724.41,3937.01 0,3937.01
GND on Top Layer "Bottom Layer-No Net" (solid, remove dead copper, pour order 2): 0,0 4724.41,0 4724.41,3937.01 0,3937.01

## Keep-outs
Keep-Out Layer:
  lines w10: 98.43,0 177.17,0 ; 196.85,0 4606.3,0 ; 0,118.11 ccw(c118.11,118.11) 118.11,0 ; 0,118.11 ccw(c118.11,118.11) 118.11,0 ; 0,118.11 ccw(c118.11,118.11) 118.11,0 ; 0,118.11 0,3818.9 ; 0,118.11 0,3818.9 ; 0,118.11 0,3818.9 ; 0,3818.9 cw(c118.11,3818.9) 118.11,3937.01 ; 0,3818.9 cw(c118.11,3818.9) 118.11,3937.01 ; 0,3818.9 cw(c118.11,3818.9) 118.11,3937.01 ; 118.11,0 4606.3,0 ; 118.11,0 4606.3,0 ; 118.11,3937.01 4606.3,3937.01 ; 118.11,3937.01 4606.3,3937.01 ; 118.11,3937.01 4606.3,3937.01 ; 4606.3,0 ccw(c4606.3,118.11) 4724.41,118.11 ; 4606.3,0 ccw(c4606.3,118.11) 4724.41,118.11 ; 4606.3,0 ccw(c4606.3,118.11) 4724.41,118.11 ; 4606.3,3937.01 cw(c4606.3,3818.9) 4724.41,3818.9 ; 4606.3,3937.01 cw(c4606.3,3818.9) 4724.41,3818.9 ; 4606.3,3937.01 cw(c4606.3,3818.9) 4724.41,3818.9 ; 4724.41,118.11 4724.41,3818.9 ; 4724.41,118.11 4724.41,3818.9 ; 4724.41,118.11 4724.41,3818.9 ; 433.07,3090.55 ccw(c472.44,3090.55) 472.44,3051.18 1377.95,3051.18 ccw(c1377.95,3090.55) 1417.32,3090.55 1417.32,3129.92 ccw(c1377.95,3129.92) 1377.95,3169.29 472.44,3169.29 ccw(c472.44,3129.92) 433.07,3129.92 433.07,3090.55

## Other copper
Top Layer:
  rectangle net GND: 3513.78,1011.81 3738.19,1055.12
  rectangle net GND: 3671.26,807.09 3730.32,1011.81
  rectangle net GND: 3454.72,811.02 3671.26,854.33
  rectangle net GND: 3450.79,811.02 3513.78,1074.8
  rectangle net GND: 448.82,1401.57 511.81,1665.35
  rectangle net GND: 452.76,1401.57 669.29,1444.88
  rectangle net GND: 669.29,1397.64 728.35,1602.36
  rectangle net GND: 511.81,1602.36 736.22,1645.67
  rectangle net VCC: 3397.64,2811.02 3846.46,3003.94
  rectangle net VCC: 3374.02,2811.02 3413.39,2968.5
  rectangle net VCC: 1393.7,2472.44 1444.88,2519.68
  rectangle net VCC: 2326.77,2649.61 2362.2,2866.34
  rectangle net VCC: 2370.08,2653.54 2393.7,2661.42
  pour cut-out: 3529.53,1000 3655.51,1000 3655.51,870.08 3529.53,870.08
  pour cut-out: 527.56,1590.55 653.54,1590.55 653.54,1460.63 527.56,1460.63
Bottom Layer:
  rectangle net VCC: 2586.61,976.38 2740.16,1086.61
  rectangle net VCC: 2885.83,2374.02 2937.01,2397.64
  rectangle net VCC: 2885.83,2393.7 2956.69,2429.13
  rectangle net VCC: 2877.95,2421.26 2976.38,2460.63
  rectangle net VCC: 932.91,2106.3 976.38,2255.91
  rectangle net VCC: 1102.36,1476.38 1618.11,1515.75
  rectangle net VCC: 1476.57,1452.95 1617.76,1500.35
  rectangle net VCC: 1791.34,2440.94 1874.02,2496.06
  rectangle net VCC: 3385.83,2641.73 3425.2,2681.1
  rectangle net VCC: 3826.77,2578.74 3976.38,2677.17

## Silkscreen, mask and mechanical layers (free items; w line width, h text height)
Top Overlay:
  text "KB" at 2903.54,118.11 h40
Top Solder:
  rectangle: 3409.45,2992.13 3866.14,3019.68
  rectangle: 3385.83,2791.34 3736.22,2992.13
  rectangle: 3732.28,2799.21 3858.27,2814.96
  lines w8.66: 3370.08,2795.28 3846.46,2795.28 ccw(c3846.46,2811.02) 3862.2,2811.02 3862.2,2814.96 3732.28,2814.96
  lines w40: 3716.54,2811.02 3425.2,2811.02 3370.08,2811.02 3370.08,2956.69 3433.07,3019.69 ; 3846.46,3019.68 3433.07,3019.68 ; 3433.07,3019.68 3433.07,3019.69

## Text inside footprints (layer, text, board x,y; h text height)
ADC: Top Overlay "2" at 1580.6,3737.42 h40; Top Overlay "1" at 1597.6,3638.42 h40
BT1: Top Overlay "+" at 1044.49,1882.8 h45.28
DDS: Top Overlay "2" at 438.87,3737.42 h60; Top Overlay "1" at 455.87,3638.42 h60
"Key Board": Top Overlay "1" at 4229.17,337.96 h60 r180; Top Overlay "2" at 4246.17,238.96 h60 r180
LCD: Top Overlay "BL" at 4334.69,1654.61 h28 r270; Top Overlay "MISO" at 4334.69,1389.61 h28.03 r270; Top Overlay "TCS" at 4334.69,1174.61 h28.03 r270; Top Overlay "MO" at 4586.1,1257.32 h28.03 r270; Top Overlay "MOSI" at 4586.1,1385.28 h28.03 r270; Top Overlay "CLK" at 4586.1,1178.58 h28.03 r270; Top Overlay "PEN" at 4334.69,1274.61 h28.03 r270; Top Overlay "D11" at 4334.69,1969.61 h28 r270; Top Overlay "GND" at 4334.69,1479.61 h28 r270; Top Overlay "GND" at 4586.1,1774.06 h28 r270; Top Overlay "RD" at 4586.1,2659.88 h28 r270; Top Overlay "D0" at 4586.1,2556.54 h28 r270; Top Overlay "D10" at 4586.1,2074.25 h28 r270; Top Overlay "VDD" at 4586.1,1675.63 h28 r270; Top Overlay "GND" at 4586.1,1577.2 h28 r270; Top Overlay "V5" at 4586.1,1473.86 h28 r270; Top Overlay "VDD" at 4334.69,1574.61 h28 r270; Top Overlay "D15" at 4334.69,1769.61 h28 r270; Top Overlay "D12" at 4586.1,1970.91 h28 r270; Top Overlay "D13" at 4330.2,1872.48 h28 r270; Top Overlay "D9" at 4334.69,2064.61 h28 r270; Top Overlay "D8" at 4586.1,2172.68 h28 r270; Top Overlay "D6" at 4586.1,2256.34 h28 r270; Top Overlay "D5" at 4334.69,2259.61 h28 r270; Top Overlay "D4" at 4586.1,2359.68 h28 r270; Top Overlay "D3" at 4334.69,2359.61 h28 r270; Top Overlay "D2" at 4586.1,2458.11 h28 r270; Top Overlay "D1" at 4334.69,2454.61 h28 r270; Top Overlay "RST" at 4334.69,2574.61 h28 r270; Top Overlay "WR" at 4334.69,2659.61 h28 r270; Top Overlay "CS" at 4334.69,2759.61 h28 r270; Top Overlay "RS" at 4586.1,2758.31 h28 r270; Top Overlay "D7" at 4334.69,2164.61 h28 r270; Top Overlay "D14" at 4586.1,1872.48 h28 r270; Bottom Overlay "CLK" at 4359.69,1179.61 h35 r90; Bottom Overlay "TCS" at 4284.69,1179.61 h35 r90; Bottom Overlay "NC" at 4359.69,1264.61 h35 r90; Bottom Overlay "PEN" at 4284.69,1289.61 h35 r90; Bottom Overlay "MO" at 4359.69,1364.61 h35 r90; Bottom Overlay "MI" at 4284.69,1359.61 h35 r90; Bottom Overlay "V5" at 4359.69,1454.61 h35 r90; Bottom Overlay "GND" at 4284.69,1484.61 h35 r90; Bottom Overlay "GND" at 4359.69,1564.61 h35 r90; Bottom Overlay "VDD" at 4284.69,1589.61 h35 r90; Bottom Overlay "VDD" at 4359.69,1669.61 h35 r90; Bottom Overlay "BL" at 4284.69,1664.61 h35 r90; Bottom Overlay "GND" at 4359.69,1774.61 h35 r90; Bottom Overlay "D15" at 4284.69,1774.61 h35 r90; Bottom Overlay "D14" at 4359.69,1874.61 h35 r90; Bottom Overlay "D13" at 4284.69,1879.61 h35 r90; Bottom Overlay "D12" at 4359.69,1979.61 h35 r90; Bottom Overlay "D11" at 4284.69,1979.61 h35 r90; Bottom Overlay "D10" at 4359.69,2084.61 h35 r90; Bottom Overlay "D9" at 4284.69,2069.61 h35 r90; Bottom Overlay "D8" at 4359.69,2164.61 h35 r90; Bottom Overlay "D7" at 4284.69,2164.61 h35 r90; Bottom Overlay "D6" at 4359.69,2259.61 h35 r90; Bottom Overlay "D5" at 4284.69,2259.61 h35 r90; Bottom Overlay "D4" at 4359.69,2364.61 h35 r90; Bottom Overlay "D3" at 4284.69,2364.61 h35 r90; Bottom Overlay "D2" at 4359.69,2464.61 h35 r90; Bottom Overlay "D1" at 4284.69,2459.61 h35 r90; Bottom Overlay "RST" at 4284.69,2579.61 h35 r90; Bottom Overlay "D0" at 4359.69,2564.61 h35 r90; Bottom Overlay "WR" at 4284.69,2664.61 h35 r90; Bottom Overlay "RD" at 4359.69,2664.61 h35 r90; Bottom Overlay "RS" at 4359.69,2769.61 h35 r90; Bottom Overlay "CS" at 4284.69,2774.61 h35 r90
SPI: Top Overlay "2" at 3470.36,3737.42 h60; Top Overlay "1" at 3487.36,3638.42 h60
"UART/Daisy Chain": Top Overlay "1" at 2640.91,3638.42 h60; Top Overlay "2" at 2623.91,3737.42 h60